# EAGLE board Led4I2C (EAGLE 6.4)
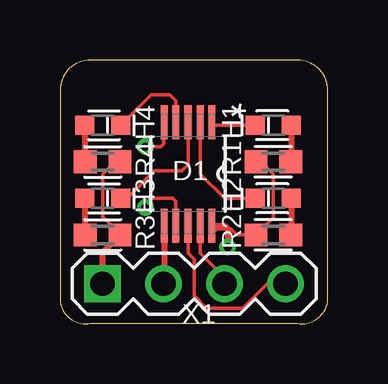
[diagram p0: board, top side]
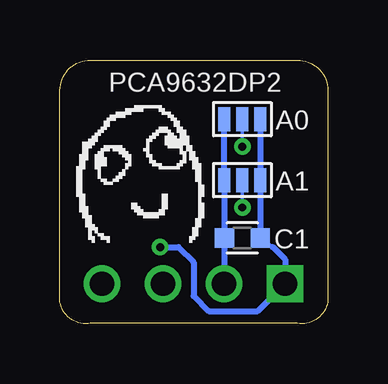
[diagram p1: board, bottom side, seen from below]

Size 11.16 x 10.99 mm. Coordinates in mm from the lower left corner, seen from the top.
Outline: 0,9.72 0,0.91 arc90 1.27,0.02 9.89,0.02 arc90 11.16,0.91 11.16,9.72 arc90 9.89,10.99 1.27,10.99 arc90 0,9.72
Copper layers (1*16): Top 0.0356mm / dielectric 1.5011mm / Bottom 0.0356mm
Design rules "LaenPCBOrder": minimum track width 6mil, minimum drill 13mil, track to track 6mil, track to pad 6mil, pad to pad 6mil, via to via 6mil, smd to smd 6mil, copper to edge 15mil, drill to drill 6mil, minimum pad ring 7mil, minimum via ring 7mil, stop-mask expansion 4mil, vias tented up to drill 0mil, thermal gap 10mil

## Footprints (pad centres in the part's own frame; a part is rotated, then mirrored left to right if it is on the bottom)
SJ-SMALL-TRI = smd 0.5 x 1: 1 -0.75,0; 2 0.75,0; 3 0,0
C0603 = smd 0.8 x 0.8: 1 -0.75,0; 2 0.75,0
SOP50P490X110-10N = smd 1.422 x 0.305: 1 -2.159,0.991; 2 -2.159,0.508; 3 -2.159,0; 4 -2.159,-0.508; 5 -2.159,-0.991; 6 2.159,-0.991; 7 2.159,-0.508; 8 2.159,0; 9 2.159,0.508; 10 2.159,0.991
CHIP-LED0603 = smd 0.8 x 0.8: A -0.75,0; C 0.75,0
R0603 = smd 0.95 x 0.95: 1 -0.725,0; 2 0.725,0
PIIKKIRIMA-4 = drill 1.016 square: 1 0,0 | drill 1.016: 2 2.54,0; 3 5.08,0; 4 7.62,0

## Placement (x,y rotation side)
A0  SJ-TRI  [SJ-SMALL-TRI]  3.56,8.53 180 bottom
A1  SJ-TRI  [SJ-SMALL-TRI]  3.56,5.99 180 bottom
C1  [C0603]  3.56,3.57 180 bottom
D1  PCA9632DP2,118  [SOP50P490X110-10N]  5.33,6.24 270 top
H1  [CHIP-LED0603]  8.89,8.27 180 top
H2  [CHIP-LED0603]  8.89,5.22 180 top
H3  [CHIP-LED0603]  1.78,5.22 0 top
H4  [CHIP-LED0603]  1.78,8.27 0 top
R1  [R0603]  8.89,6.75 180 top
R2  [R0603]  8.89,3.7 180 top
R3  [R0603]  1.78,3.7 0 top
R4  [R0603]  1.78,6.75 0 top
U$1  [DAFUG]  7.62,5.99 0 bottom
X1  PIIKKIRIMA-4  [PIIKKIRIMA-4]  1.78,1.67 0 top

## Library data of the parts
A0 A1 H1-H4 X1 = OMAT_IC
C1 R1-R4 = rcl
D1 = NXP_By_element14_Batch_1; MPN: PCA9632DP2,118; OC_FARNELL: 1867849; OC_NEWARK: 70R6723; PACKAGE: TSSOP-10; SUPPLIER: NXP
U$1 = dafug

## Nets
+3V3: A0.1 A1.1 C1.1 D1.10 R1.2 R2.2 R3.2 R4.2 X1.1
A0: A0.3 D1.5
A1: A1.3 D1.7
GND: A0.2 A1.2 C1.2 D1.6 X1.2
LED0: D1.1 H1.C
LED1: D1.2 H2.C
LED2: D1.3 H3.C
LED3: D1.4 H4.C
N$7: H1.A R1.1
N$8: H2.A R2.1
N$9: H3.A R3.1
N$10: H4.A R4.1
SCL: D1.8 X1.4
SDA: D1.9 X1.3

## Tracks (layer width: path | path; a pad name or v marks a point on that pad's centre or on a via)
+3V3  (via drill 0.33)
  Top 0.152: R4.2 2.29,6.75 1.78,6.24 1.78,4.46 2.5,3.74 R3.2 | 8.13,6.75 R1.2 8.38,6.75 8.89,6.24 8.89,4.42 R2.2 7.37,3.7 7.11,3.95 6.99,3.95 6.45,3.95
  Top 0.254: 6.45,3.95 D1.10 6.86,4.08 6.99,3.95 v6.99,3.19 | X1.1 1.78,2.97 R3.2
  Bottom 0.152: C1.1 2.3,3.2
  Bottom 0.254: 2.3,3.2 1.78,2.68 X1.1 2.92,0.52 4.95,0.52 5.59,1.16 5.59,2.56 6.22,3.19 v6.99,3.19 | C1.1 A1.1 A0.1
A0  (via drill 0.33)
  Top 0.152: v3.56,7.38 4.19,7.38 4.32,7.51 4.32,8.37 D1.5
  Bottom 0.152: A0.3 v3.56,7.38
A1  (via drill 0.33)
  Top 0.152: v3.56,4.84 3.56,4.97 3.81,5.22 4.7,5.22 4.83,5.1 D1.7
  Bottom 0.152: A1.3 v3.56,4.84
GND
  Top 0.152: 4.34,1.69 X1.2
  Top 0.254: D1.6 4.34,1.69
  Bottom 0.254: X1.2 4.31,2.19 C1.2 A1.2 A0.2
LED0
  Top 0.152: H1.C 6.45,8.27 D1.1
LED1
  Top 0.152: H2.C 6.86,5.22 5.84,6.24 D1.2
LED2
  Top 0.152: H3.C 2.79,5.22 3.94,6.37 5.08,6.37 5.33,6.62 D1.3
LED3
  Top 0.152: H4.C 2.54,8.27 3.81,9.54 4.57,9.54 4.83,9.29 D1.4
N$7
  Top 0.152: 9.64,6.77 R1.1
  Top 0.254: H1.A 9.64,6.77
N$8
  Top 0.152: 9.64,3.72 R2.1
  Top 0.254: H2.A 9.64,3.72
N$9
  Top 0.152: 1.03,3.72 R3.1
  Top 0.254: H3.A 1.03,3.72
N$10
  Top 0.152: 1.03,6.77 R4.1
  Top 0.254: H4.A 1.03,6.77
SCL
  Top 0.152: X1.4 8.64,1.67 7.62,0.65 6.1,0.65 5.59,1.16 5.59,2.68 5.33,2.94 D1.8
SDA
  Top 0.152: X1.3 6.86,1.92 5.84,2.94 D1.9

## Text on the board
bPlace: PCA9632DP2